# Altium PCB DaughterboardPCB.PcbDoc
Units mil, origin at the board's own origin, x right, y up, seen from the top; angles counter-clockwise.
Board outline 1300 x 1491 mil, 2 copper layers (Top Layer, Bottom Layer), stack 38.189 mil thick; 12 components, 11 nets, 56 pads, 13 vias.
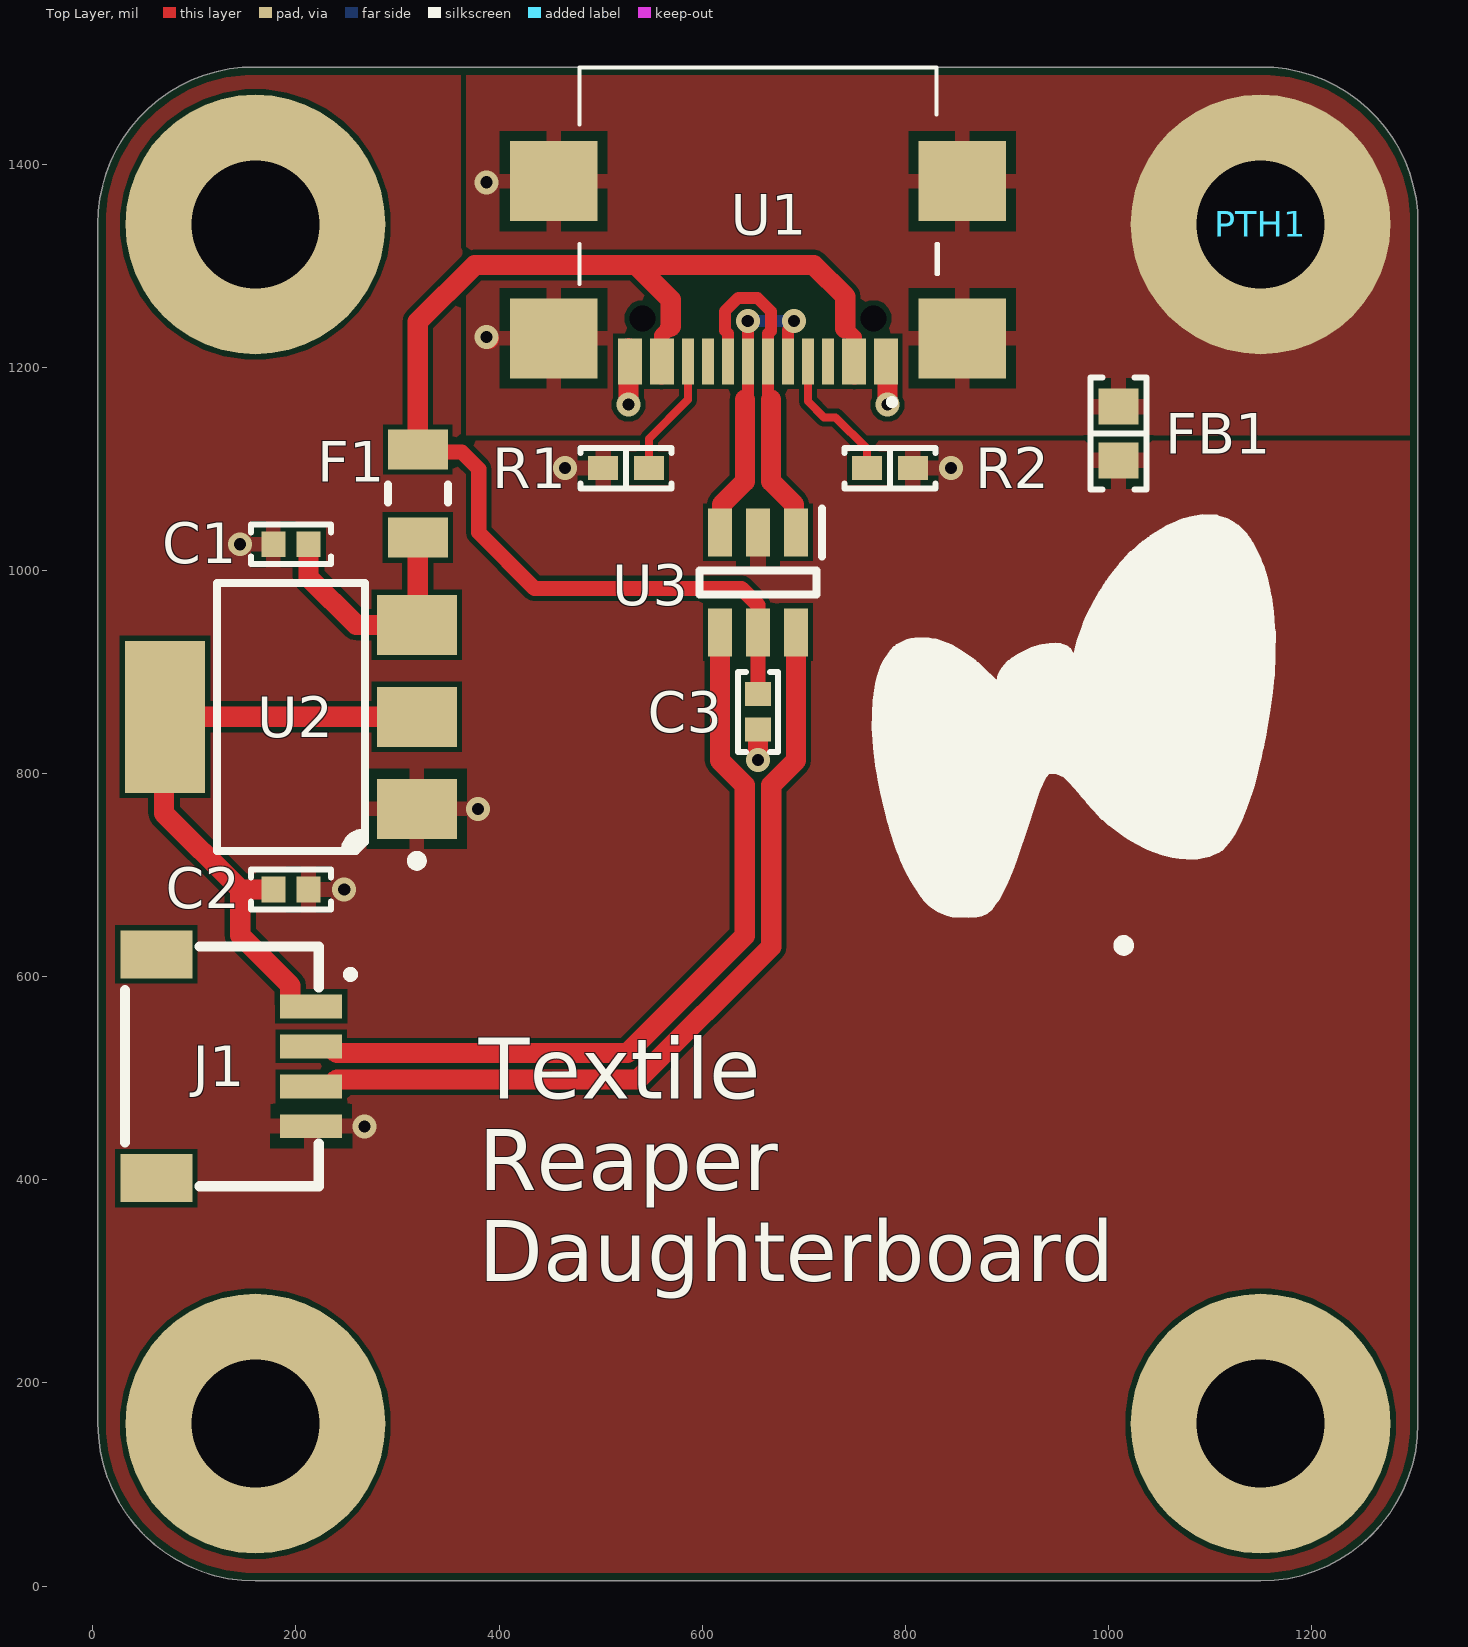
[diagram p0: Top Layer view]
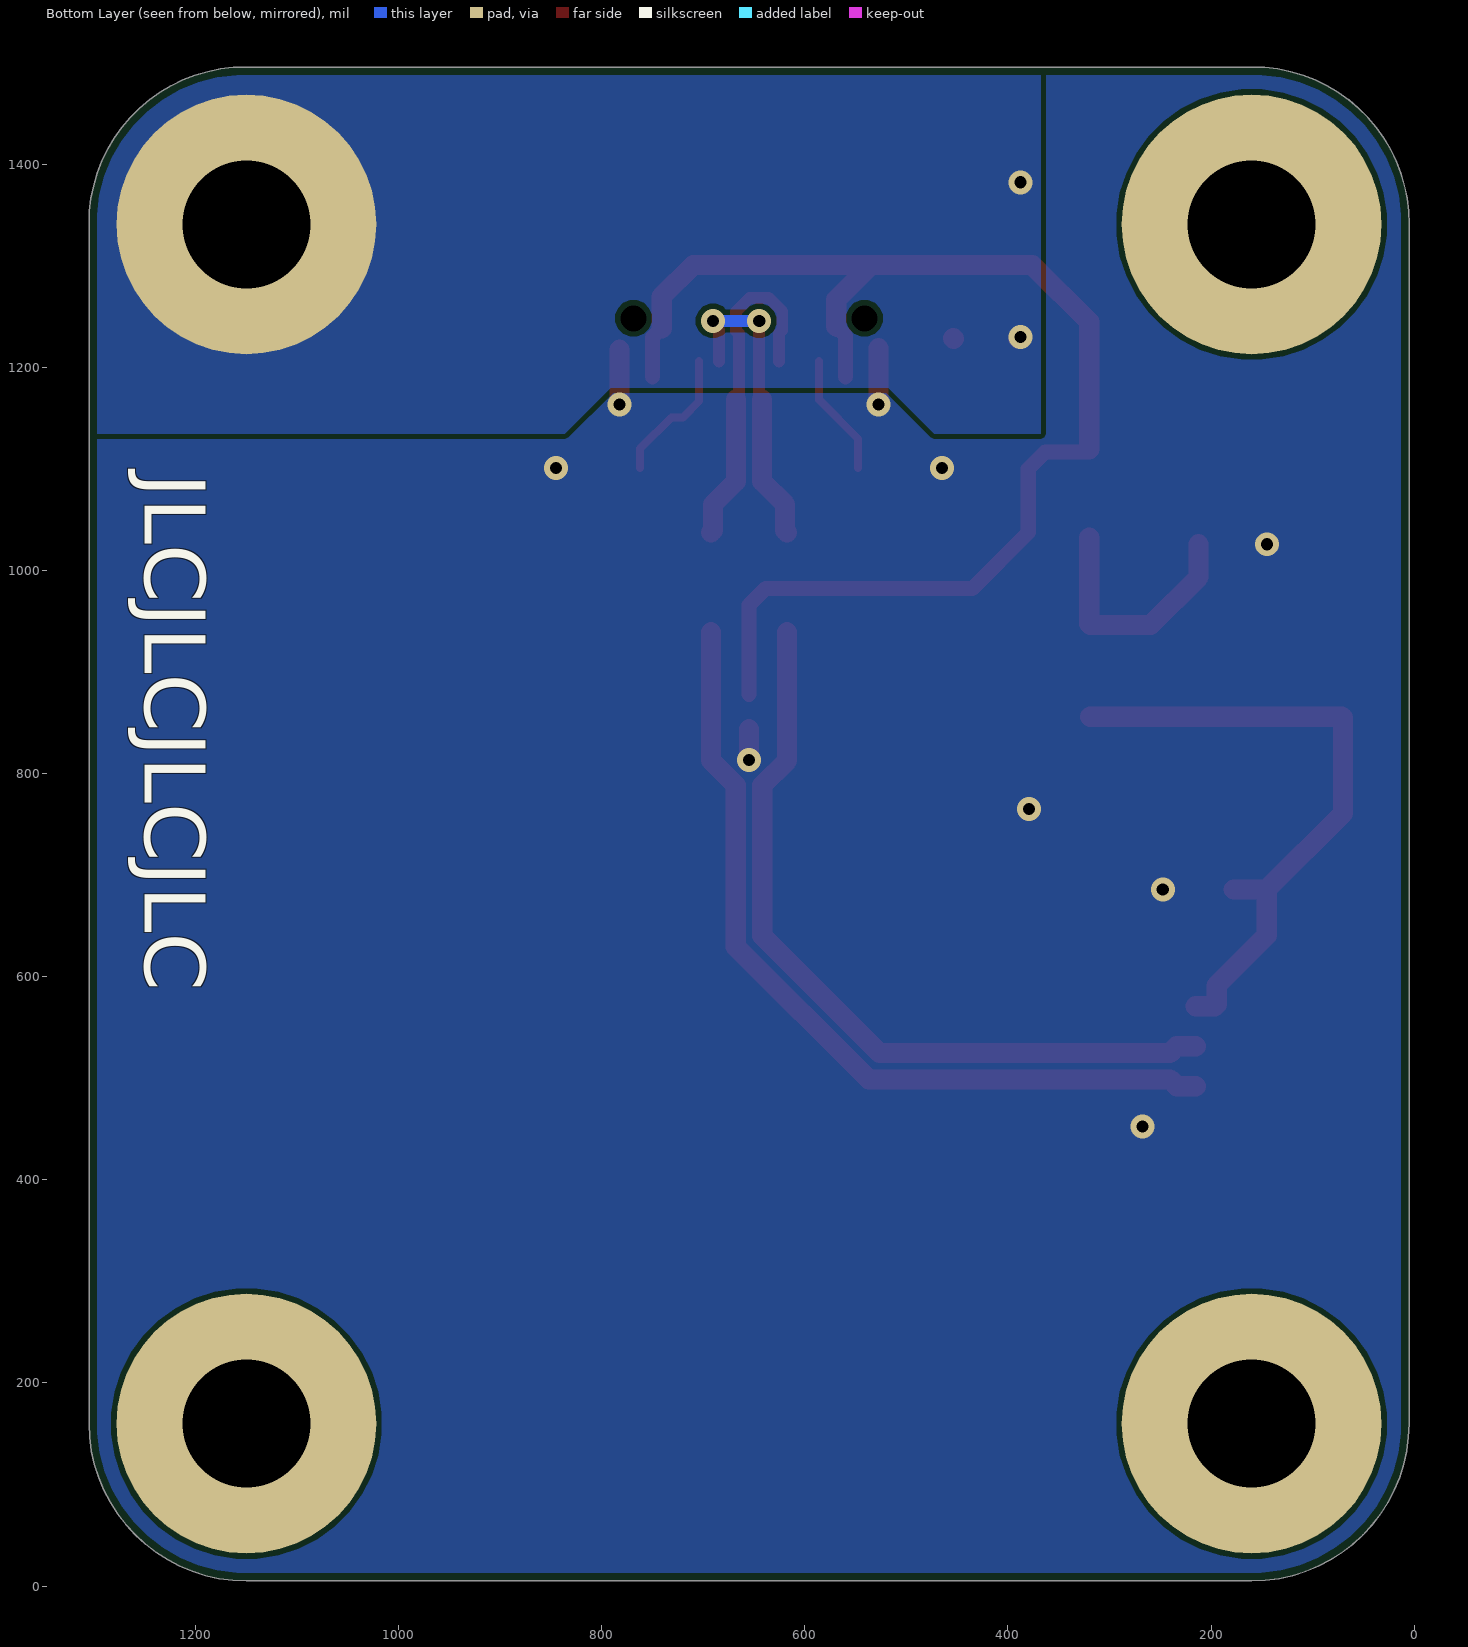
[diagram p1: Bottom Layer view, seen from below]

## Layer stack, top to bottom
Top Solder: solder mask 0.8, Solder Resist, Dk 3.8
Top Layer: signal copper 1.378
Dielectric: core 35.433, FR-4, Dk 4.6
Bottom Layer: signal copper 1.378
Bottom Solder: solder mask 0.8, Solder Resist, Dk 3.8

## Board outline
5.01,160 ccw(c160.01,160) 160.01,5 1150.01,5 ccw(c1149.66,160.34) 1305.01,160 1305.01,1341 ccw(c1151.35,1342.35) 1150.01,1496 160.01,1496 ccw(c158.66,1342.35) 5.01,1341

## Design rules (kind name [scope] priority, off if disabled: settings)
BoardOutlineClearance [All] p1: gap=7.87 ignorepadtopadclearanceinfootprint=FALSE
Clearance [All] p1: gap=5 ignorepadtopadclearanceinfootprint=FALSE except(0: Arc-Hole Track-Hole SMDPad-Hole THPad-Hole Via-Hole Fill-Hole Poly-Hole Region-Hole Text-Hole)
ComponentClearance [All] p1: gap=5 collisioncheckmode=3 verticalgap=5 showdistances=TRUE
DiffPairsRouting DiffPairsRouting_USB [InDifferentialPairClass('USB_Lines')] p1: maxlimit=6 minlimit=6 mostfreqgap=6 toplayer_minwidth=8 toplayer_maxwidth=31.5 toplayer_prefwidth=19.81 bottomlayer_minwidth=8 bottomlayer_maxwidth=31.5 bottomlayer_prefwidth=19.81 maxuncoupledlength=500
DiffPairsRouting [All] p2: maxlimit=10 minlimit=5 mostfreqgap=5 toplayer_minwidth=5 toplayer_maxwidth=1000 toplayer_prefwidth=5 bottomlayer_minwidth=5 bottomlayer_maxwidth=1000 bottomlayer_prefwidth=5 maxuncoupledlength=500
Height [All] p1: minheight=0 maxheight=71497.94 prefheight=500
HoleSize [All] p1: absolutevalues=TRUE maxlimit=248.03 minlimit=11.81 maxpercent=80.000 minpercent=20.000
HoleToHoleClearance [All] p1: gap=9.84 allowstackedmicrovias=FALSE
MinimumAnnularRing [All] p1: minimumring=3
MinimumSolderMaskSliver [All] p1: minsoldermaskwidth=0
PlaneClearance [All] p1: clearance=5
PlaneConnect PlaneConnectPowerPads [InPadClass('PowerPads')] p1: planeconnectstyle=Direct reliefexpansion=20 reliefentries=4 reliefconductorwidth=10 reliefairgap=10
PlaneConnect [All] p2: pad.planeconnectstyle=Relief pad.reliefexpansion=11.81 pad.reliefentries=4 pad.reliefconductorwidth=5 pad.reliefairgap=5 via.planeconnectstyle=Direct via.reliefexpansion=11.81 via.reliefentries=4 via.reliefconductorwidth=5 via.reliefairgap=5
PolygonConnect PolygonConnectPowerPads [All vs (InPadClass('PowerPads'))] p1: connectstyle=Direct reliefconductorwidth=10 reliefentries=4 polygonreliefangle="90 Angle" airgapwidth=10
PolygonConnect [All] p2: thpad.connectstyle=Direct thpad.reliefconductorwidth=5 thpad.reliefentries=4 thpad.polygonreliefangle="90 Angle" thpad.airgapwidth=5 smdpad.connectstyle=Relief smdpad.reliefconductorwidth=15 smdpad.reliefentries=4 smdpad.polygonreliefangle="90 Angle" smdpad.airgapwidth=10 via.connectstyle=Direct via.reliefconductorwidth=5 via.reliefentries=4 via.polygonreliefangle="90 Angle" via.airgapwidth=5
RoutingVias [All] p1: holewidth=11.81 width=23.62 viastyle="Through Hole" minholewidth=11.81 minwidth=23.62 maxholewidth=23.62 maxwidth=259.84
SilkToSilkClearance [All] p1: silktosilkclearance=0
SilkToSolderMaskClearance [IsPad] p1: minsilkscreentomaskgap=5 clearancetoexposedcopper=TRUE
SolderMaskExpansion [All] p1: expansion=2.95 istentingtop=FALSE
UnRoutedNet [All] p1: checkbadconnections=TRUE
Width [All] p1: maxlimit=1000 minlimit=5 preferedwidth=8 minimp=50.000000 maximp=50.000000 favimp=50.000000
19 further rules are at their usual default settings.

## Classes and differential pairs
differential pair class USB_Lines: USB USB_CONN USB_TVS
net class USB: USB_N USB_P
net class USB_TVS: USB_TVS_N USB_TVS_P
differential pair USB: +USB_P -USB_N
differential pair USB_TVS: +USB_TVS_P -USB_TVS_N

## Components (designator, comment, footprint, x,y, rotation, side; value= is the part's Value field where it differs from the comment)
C1 "10µF" "CAP 0402_1005" 195.01,1026 r0 top
C2 "10µF" "CAP 0402_1005" 195.01,686 r180 top
C3 "100nF" "CAP 0402_1005" 655.01,861 r90 top
F1 "6V / 500mA" FP-MF-PSMF-MFG 320.01,1076 r270 top value=0.15-0.9Ω
FB1 "60 Ohms @ 100 MHz" "FER 0603_1608" 1010,1135 r270 top
J1 "SM04B-SRSS-TB_LF__SN_" SM04B-SRSS-TB(LFSN) 31.5,630 r270 top
PTH1 "M3" SCREW_HOLE 1230.01,1351 r0 top
R1 "5k1" "RES 0402_1005" 525.01,1101 r180 top
R2 "5k1" "RES 0402_1005" 785.01,1101 r180 top
U1 "USB4110-GF-A" USB4110GFA 655.01,1351 r180 top
U2 "NCP1117ST33T3G" "ON SEMI SOT-223 ST(318H)" 195.01,856 r180 top
U3 "USBLC6-2SC6" SOT95P280X145-6N 655.01,988.5 r270 top

## Footprints (in the part's own frame and the unit in brackets; to place one, negate y for a bottom-side part, rotate by r counter-clockwise, add the part's x,y. Pads: shape width x height; smd on the part's side, far side on the other; paste and mask are expansions set on the pad)
"CAP 0402_1005" [mm] "Chip Capacitor, 2-Leads, Body 1.02x0.51mm, IPC Medium Density"
  rect 0.6x0.64 smd: 1(-0.44,0) 2(0.44,0)
  silkscreen extent -1,-0.5 1,0.5, body extent -0.5,-0.26 0.5,0.26, height 0.52
"FER 0603_1608" [mm] "Chip Ferrite, 2-Leads, Body 1.60x0.80mm, IPC Medium Density"
  rect 0.9x1 smd: 1(-0.675,0) 2(0.675,0)
  silkscreen extent -1.4,-0.7 1.4,0.7, body extent -0.8,-0.41 0.8,0.41, height 0.82
FP-MF-PSMF-MFG [mm]
  rect 1x1.5 smd paste+0 mask+0: 1(-1.1,0) 2(1.1,0)
  silkscreen extent -0.23,-0.75 0.23,0.75, body extent -1.7,-0.85 1.7,0.85, height 0.25
"ON SEMI SOT-223 ST(318H)" [mm] "SOT223, 4-Leads, Body 6.50x7.00mm (avg), Pitch 2.30mm, IPC Medium Density"
  rect 2x1.5 smd: 1(-3.15,2.3) 2(-3.15,0) 3(-3.15,-2.3)
  rect 2x3.8 smd: 4(3.15,0)
  silkscreen extent -3.27,-3.35 1.85,3.72, body extent -3.52,-3.25 3.5,3.25, height 1.8
"RES 0402_1005" [mm] "Chip Resistor, 2-Leads, Body 1.0x0.5mm, IPC Medium Density"
  rect 0.75x0.6 smd: 1(-0.575,0) 2(0.575,0)
  silkscreen extent -1.14,-0.51 1.14,0.51, body extent -0.5,-0.25 0.5,0.25, height 0.35
SCREW_HOLE [mm] "Screw hole"
  round 6.5 hole 3.2: 1(-2.032,-0.254)
SM04B-SRSS-TB(LFSN) [mm]
  rect 0.6x1.55 smd: 1(1.5,4.661) 2(2.5,4.661) 3(3.5,4.661) 4(4.5,4.661)
  rect 1.2x1.8 smd: 5(0.2,0.786) 6(5.8,0.786)
  silkscreen extent 0,0 6,5.7, body extent 0,0.28 6,5.23, height 2.97
SOT95P280X145-6N [mm]
  rect 1.2x0.6 smd: 1(-1.25,0.95) 2(-1.25,0) 3(-1.25,-0.95) 4(1.25,-0.95) 5(1.25,0) 6(1.25,0.95)
  silkscreen extent -1.85,-1.46 0.3,1.6, body extent -1.4,-1.46 1.4,1.46, height 1.45
USB4110GFA [mm]
  rect 0.3x1.15 smd: A1(-3.35,3.678) A4(-2.55,3.678) A5(-1.25,3.678) A6(-0.25,3.678) A7(0.25,3.678) A8(1.25,3.678) A9(2.55,3.678) A12(3.35,3.678) B1(3.05,3.678) B4(2.25,3.678) B5(1.75,3.678) B6(0.75,3.678) B7(-0.75,3.678) B8(-1.75,3.678) B9(-2.25,3.678) B12(-3.05,3.678)
  round 0.325 hole 0.65 unplated: MH1(-2.89,2.603) MH2(2.89,2.603)
  rect 2.18x2 smd: MP1(-5.11,-0.827) MP2(5.11,-0.827) MP3(-5.11,3.103) MP4(5.11,3.103)
  silkscreen extent -4.5,-3.68 4.47,4.75, body extent -5.65,-3.68 5.65,4.02, height 3.26

## Part data
C1 C2: library part CL05A106MP8NUB8, "CAP CER 10UF 10V X5R 0402", Capacitance="10 µF", Device Package="0402 (1005 Metric)", manufacturer="Samsung Electro-Mechanics", Operating Temperature="-55°C ~ 85°C", Supplier Part Number 1=1276-6830-1-ND, Temperature Coefficient=X5R, Tolerance=±20%, Voltage - Rated=10V, Applications="General Purpose", componentlink1description=Datasheet, componentlink1url=http://www.samsungsem.com/kr/support/product-search/mlcc/CL05A106MP8NUB8.jsp, componentlink2description="DigiKey Link", componentlink2url=https://www.digikey.com/en/products/detail/samsung-electro-mechanics/CL05A106MP8NUB8/5961314, lastupdated="11.08.2022 08:52:23", Lifecycle Status=Active, Minimum Order=1, Mounting Type="Surface Mount, MLCC", Package / Case="0402 (1005 Metric)", packaging=TapeAndReel, Part Number=CL05A106MP8NUB8, Part Status=Active, partid=1758, price=0.07, series=CL, Size / Dimension="0.039\" L x 0.020\" W (1.00mm x 0.50mm)", Supplier 1=DigiKey, Thickness (Max)="0.035\" (0.90mm)"
C3: library part C0402C104K4RECAUTO, "CAP CER 0402 0.1UF 16V X7R 10%", Capacitance="0.1 µF", Device Package="0402 (1005 Metric)", manufacturer=KEMET, Operating Temperature="-55°C ~ 125°C", Ratings=AEC-Q200, Supplier Part Number 1=399-17167-1-ND, Temperature Coefficient=X7R, Tolerance=±10%, Voltage - Rated=16V, Applications="Automotive, ESD Protection", componentlink1description=Datasheet, componentlink1url=https://api.kemet.com/component-edge/download/datasheet/C0402C104K4RECAUTO.pdf, componentlink2description="DigiKey Link", componentlink2url=https://www.digikey.com/en/products/detail/kemet/C0402C104K4RECAUTO/8563695, lastupdated="11.08.2022 08:52:24", Lifecycle Status=Active, Minimum Order=1, Mounting Type="Surface Mount, MLCC", Package / Case="0402 (1005 Metric)", packaging=TapeAndReel, Part Number=C0402C104K4RECAUTO, Part Status=Active, partid=1731, price=0.02, series="ESD SMD Auto X7R", Size / Dimension="0.039\" L x 0.020\" W (1.00mm x 0.50mm)", Supplier 1=DigiKey, Thickness (Max)="0.022\" (0.55mm)"
F1: library part CMP-07400-000013-1, "PTC RESET FUSE 6V 500MA 0805", Ambient Temperature Range High=+85°C, Ambient Temperature Range Low=-40°C, Current Rating=40A, Hold Current=0.5A, manufacturer="Bourns Inc.", Manufacturer Part Number=MF-PSMF050X-2, Package=MF-PSMF, Resistance=0.15-0.9Ω, Temperature="-40°C to +85°C", Trip Current=1A, Voltage Rating=6V, Automotive=Yes, Category=Fuse, componentlink2description=Datasheet, componentlink2url=https://www.bourns.com/docs/product-datasheets/mfpsmf.pdf?sfvrsn=9c05cafe_24, Device Class L1="Circuit Protection", Device Class L2="PTC Resettable Fuses", Device Class L3=unset, Digikey Description="PTC RESET FUSE 6V 500MA 0805", Height=0.85mm, Lead Free=Yes, Mouser Description="Resettable Fuses - PPTC .50A 6V 0.15ohm Hold .5 Trip 1", Octopart=https://octopart.com/mf-psmf050x-2-bourns-7483438, RoHS=TRUE, Temperature Range High=+85°C, Temperature Range Low=-40°C, Trip Time=0.1s
FB1: library part FBTH1608HE600-T, "FERRITE BEAD,HIGH CURRENT, 0603", Current Rating (Max)=2.25A, DC Resistance (DCR) (Max)=25mOhm, Device Package="0603 (1608 Metric)", manufacturer="Taiyo Yuden", Operating Temperature="-40°C ~ 150°C", Ratings=AEC-Q200, Supplier Part Number 1=587-6594-1-ND, componentlink1description=Datasheet, componentlink1url=https://ds.yuden.co.jp/TYCOMPAS/ut/detail?pn=FBTH1608HE600-T&u=M, componentlink2description="DigiKey Link", componentlink2url=https://www.digikey.com/en/products/detail/taiyo-yuden/FBTH1608HE600-T/10324933, Filter Type="Power Line", Height (Max)="0.037\" (0.95mm)", lastupdated="11.08.2022 09:33:59", Lifecycle Status=Active, Minimum Order=1, Mounting Type="Surface Mount", Number of Lines=1, Package / Case="0603 (1608 Metric)", packaging=TapeAndReel, Part Number=FBTH1608HE600-T, Part Status=Active, partid=706, price=0.09, series=FB, Size / Dimension="0.063\" L x 0.031\" W (1.60mm x 0.80mm)", Supplier 1=DigiKey, Impedance @ Frequency="60 Ohms @ 100 MHz"
J1: "Connector", Arrow Part Number=SM04B-SRSS-TB(LF)(SN), Manufacturer_Name="JST (JAPAN SOLDERLESS TERMINALS)", Arrow Price/Stock=https://www.arrow.com/en/products/sm04b-srss-tb-lf-sn/jst-manufacturing, Datasheet Link=http://www.jst-mfg.com/product/pdf/eng/eSH.pdf, Manufacturer_Part_Number=SM04B-SRSS-TB(LF)(SN)
PTH1: library part Hole
R1 R2: library part RC0402JR-075K1L, "RES 5.1K OHM 5% 1/16W 0402", Device Package="0402 (1005 Metric)", manufacturer=Yageo, Operating Temperature="-55°C ~ 155°C", Power (Watts)="0.063W, 1/16W", Resistance="5.1 kOhms", Supplier Device Package=0402, Supplier Part Number 1=311-5.1KJRCT-ND, Temperature Coefficient=±100ppm/°C, Tolerance=±5%, componentlink1description=Datasheet, componentlink1url=https://www.yageo.com/upload/media/product/productsearch/datasheet/rchip/PYu-RC_Group_51_RoHS_L_10.pdf, componentlink2description="DigiKey Link", componentlink2url=https://www.digikey.com/en/products/detail/yageo/RC0402JR-075K1L/726487, Composition="Thick Film", Features="Moisture Resistant", Height - Seated (Max)="0.016\" (0.40mm)", lastupdated="11.08.2022 09:08:05", Lifecycle Status=Active, Minimum Order=1, Number of Terminations=2, Package / Case="0402 (1005 Metric)", packaging=CutTape, Part Number=RC0402JR-075K1L, Part Status=Active, partid=4786, price=0.01, series=RC_L, Size / Dimension="0.039\" L x 0.020\" W (1.00mm x 0.50mm)", Supplier 1=DigiKey
U1: "Connector", Manufacturer_Name="GCT (GLOBAL CONNECTOR TECHNOLOGY)", Mouser Part Number=640-USB4110-GF-A, Datasheet Link=https://gct.co/files/drawings/usb4110.pdf, Height=3.26mm, Manufacturer_Part_Number=USB4110-GF-A, Mouser Price/Stock=https://www.mouser.co.uk/ProductDetail/GCT/USB4110-GF-A?qs=KUoIvG%2F9IlYiZvIXQjyJeA%3D%3D
U2: "IC REG LINEAR 3.3V 1A SOT223", Current - Output=1A, Current - Quiescent (Iq)=10mA, manufacturer="ON Semiconductor", Package / Case="TO-261-4, TO-261AA", Supplier Device Package=SOT-223, Supplier Part Number 1=NCP1117ST33T3GOSCT-ND, Voltage - Output (Min/Fixed)=3.3V, Voltage - Input (Max)=20V, Voltage Dropout (Max)="1.2V @ 800mA", componentlink1description=Datasheet, componentlink1url=https://www.onsemi.com/pub/Collateral/NCP1117-D.PDF, componentlink2description="DigiKey Link", componentlink2url=http://digikey.com/product-detail/en/on-semiconductor/NCP1117ST33T3G/NCP1117ST33T3GOSCT-ND/660708, lastupdated="9.08.2022 12:47:35", Lifecycle Status=Active, Minimum Order=1, Mounting Type="Surface Mount", Number of Regulators=1, Output Configuration=Positive, Output Type=Fixed, packaging=TapeAndReel, Part Number=NCP1117ST33T3G, Part Status=Active, price=0.15, Protection Features="Over Current, Over Temperature", PSRR="64dB (120Hz)", series=-, Supplier 1=DigiKey
U3: "Integrated Circuit", Manufacturer_Name=STMicroelectronics, Mouser Part Number=511-USBLC6-2SC6, Arrow Part Number=USBLC6-2SC6, Arrow Price/Stock=https://www.arrow.com/en/products/usblc6-2sc6/stmicroelectronics?region=nac, Datasheet Link=http://www.st.com/st-web-ui/static/active/en/resource/technical/document/datasheet/CD00050750.pdf, Height=1.45mm, Manufacturer_Part_Number=USBLC6-2SC6, Mouser Price/Stock=https://www.mouser.co.uk/ProductDetail/STMicroelectronics/USBLC6-2SC6?qs=po45yt2pPpu%2FhNIlwQdTlg%3D%3D

## Free pads (board coordinates)
  round 255.91 hole 125.98 mask+2.95: 2(160.01,1341) 3(160.01,160) 4(1150.01,160)

## Via types
v1: diameter 23.62, hole 12, Top Layer to Bottom Layer, tented both sides, 13 vias

## Nets (pads, with @x,y where several pads share a name; then routed paths per layer and width w, separated by ;. In a path a pad name is that pad's centre, name@x,y a point inside that pad or via, vN(x,y) a via of type N, cw(c..) or ccw(c..) an arc to the next point about the centre after c; other vN are vias at no path point)
+3V3: C2.2 J1.1 U2.2 U2.4 | length 637.2
  Top Layer w20: C2.2 145.01,686 ; J1.1 196.31,570.94 194.49,572.76 194.49,591.46 145.01,640.94 145.01,686 ; U2.2 U2.4 70.01,855.02 70.01,761 145.01,686
CHASIS: FB1.1 PTH1.1 U1.MP1 U1.MP2 U1.MP3 U1.MP4 | length 3.6
  Top Layer w20: v1(387.5,1230) 388.48,1230 v1@389.98,1228.5 ; U1.MP4@453.49,1228.5 U1.MP4
  other v1: 387.5,1382.5
GND: C1.1 C2.1 C3.1 FB1.2 J1.4 R1.2 R2.1 U1.A1 U1.A12 U1.B1 U1.B12 U2.1 U3.2 | length 139.7
  Top Layer w20: v1(527.51,1163.5) U1.A12@527.5,1219.06 ; v1(655.01,813.5) C3.1 ; v1(782.51,1163.5) U1.A1@782.5,1217.5
  other v1: 267.5,452.5 247.51,686 379.23,765.37 145.01,1026 465.01,1101 845.01,1101
NetC1_2: C1.2 F1.2 U2.3 | length 245.1
  Top Layer w20: C1.2 212.33,993.68 259.45,946.55 U2.3 320.01,947.54 F1.2
NetR1_1: R1.1 U1.B5 | length 121.1
  Top Layer w8: R1.1 547.64,1129.91 586.11,1168.37 U1.B5
NetR2_2: R2.2 U1.A5 | length 136
  Top Layer w8: U1.A5 704.22,1166.79 720.01,1151 731.5,1151 762.37,1120.13 R2.2
USB_N: U1.A7 U1.B7 U3.3 | length 307.5
  Top Layer w11.81: 642.1,1168.5 645.16,1171.56 U1.A7 645.16,1245.84 v1(645.01,1246) ; U1.B7 684.53,1236.9 690.44,1242.8 v1(690.44,1246)
  Top Layer w19.81: U3.3 619.51,1039.62 619.51,1065.24 642.1,1087.83 642.1,1168.5
  Bottom Layer w11.81: v1(645.01,1246) v1(690.44,1246)
USB_P: U1.A6 U1.B6 U3.1 | length 337.3
  Top Layer w11.81: U1.B6 625.48,1233.4 622.29,1236.59 622.29,1255.41 635.6,1268.72 654.42,1268.72 667.72,1255.41 667.72,1236.22 664.85,1233.34 U1.A6 664.85,1171.56 667.91,1168.5
  Top Layer w19.81: 667.91,1168.5 667.91,1087.83 690.5,1065.24 690.5,1039.62 U3.1
USB_TVS_N: J1.2 U3.4 | length 786.6
  Top Layer w20: J1.2 233.71,531.57 240.39,524.89 526.4,524.89 642.01,640.5 642.01,788.58 617.6,812.99 U3.4
USB_TVS_P: J1.3 U3.6 | length 829.6
  Top Layer w20: J1.3 233.71,492.2 240.39,498.89 537.17,498.89 668.01,629.73 668.01,788.58 692.41,812.99 U3.6
VUSB: C3.2 F1.1 U1.A4 U1.A9 U1.B4 U1.B9 U3.5 | length 1316.2
  Top Layer w15: F1.1 322.56,1116.75 363.25,1116.75 380,1100 380,1037.5 435,982.5 638.71,982.5 655,966.21 U3.5 C3.2 ; U1.A9@560.01,1191 560.01,1231.53 568.41,1239.93 ; 740.99,1238.87 750.01,1229.85 U1.A4@750.01,1191
  Top Layer w20: F1.1 320.01,1245.01 376,1301 535.01,1301 ; 568.41,1239.93 569.02,1240.54 569.02,1266.98 535.01,1301 ; 740.99,1238.87 740.99,1270.02 710.01,1301 535.01,1301
pads on no net: J1.5 J1.6 U1.A8 U1.B8 U1.MH1 U1.MH2

## Polygon pours and split planes (outlines as drawn)
GND on Top Layer "GND_L01_P004" (solid, pour order 4): 552.5,1133.5 586.9,1167.9 586.9,1186.49 704.22,1186.49 704.22,1166.79 720.01,1151 731.5,1151 749,1133.5 1305.01,1133.5 1305.01,5 5,5 5,1497.5 366.01,1497.5 367.51,1496 367.51,1133.5
CHASIS on Top Layer "CHASIS_L01_P002" (solid, remove dead copper, pour order 2): 552.5,1133.5 586.11,1167.11 586.11,1187.28 586.9,1186.49 704.22,1186.49 704.22,1166.79 720.01,1151 731.5,1151 749,1133.5 1305.01,1133.5 1305.01,1494.5 367.51,1494.5 367.51,1133.5
GND on Bottom Layer "GND_L02_P001" (solid, pour order 1): 472.5,1135 517.81,1180.31 790.94,1180.31 836.26,1135 1305.01,1135 1305.01,5 5,5 5,1497.5 366.01,1497.5 367.51,1496 367.51,1135
CHASIS on Bottom Layer "CHASIS_L02_P000" (solid, remove dead copper, pour order 0): 472.5,1135 517.81,1180.31 790.94,1180.31 836.26,1135 1297.5,1135 1297.5,1496 367.51,1496 367.51,1135
CHASIS on Bottom Solder "CHASIS_L02_P003" (solid, pour order 3): 952.5,1496 952.5,1135 1305,1135 1305,1497.5

## Silkscreen, mask and mechanical layers (free items; w line width, h text height)
Top Overlay:
  drawing of 2 lines, arcs and shapes, not listed
  text "Textile / Reaper / Daughterboard" at 380.24,300 h60
Bottom Overlay:
  text "JLCJLCJLCJLC" at 1250,1096 h60 r90
Board Edge:
  lines w7.87: 1.07,1340.97 cw(c158.66,1342.35) 1.07,1340.98 ; 160.04,1499.94 ccw(c158.66,1342.35) 160.01,1499.94 ; 1149.97,1499.94 cw(c1151.35,1342.35) 1150,1499.94 ; 1308.94,1340.97 ccw(c1151.35,1342.35) 1308.94,1340.99 ; 1.07,160 ccw(c160.01,160) 160.01,1.06 ; 1.07,160 1.07,1340.98 ; 1.07,160 1.07,160 ; 1.07,1340.98 cw(c158.66,1342.35) 160.01,1499.94 ; 1.07,1340.98 1.07,1341 ; 160.01,1.06 1150.01,1.06 ; 160.01,1.06 160.01,1.06 ; 160.01,1499.94 1150,1499.94 ; 160.01,1499.94 160.01,1499.94 ; 1150.01,1.06 ccw(c1149.66,160.34) 1308.94,159.99 ; 1150.01,1.06 ccw(c1150.01,5) 1150.01,1.06 ; 1150,1499.94 cw(c1151.35,1342.35) 1308.95,1342.35 cw(c1151.35,1342.35) 1308.94,1340.99 ; 1150,1499.94 1150.01,1499.94 ; 1308.94,159.99 ccw(c1305.01,160) 1308.94,160 ; 1308.94,159.99 ccw(c1305.01,160) 1308.94,160 ; 1308.94,160 1308.94,1340.99 ; 1308.94,1340.99 1308.94,1341